# EAGLE board shield (EAGLE 6.5.0)
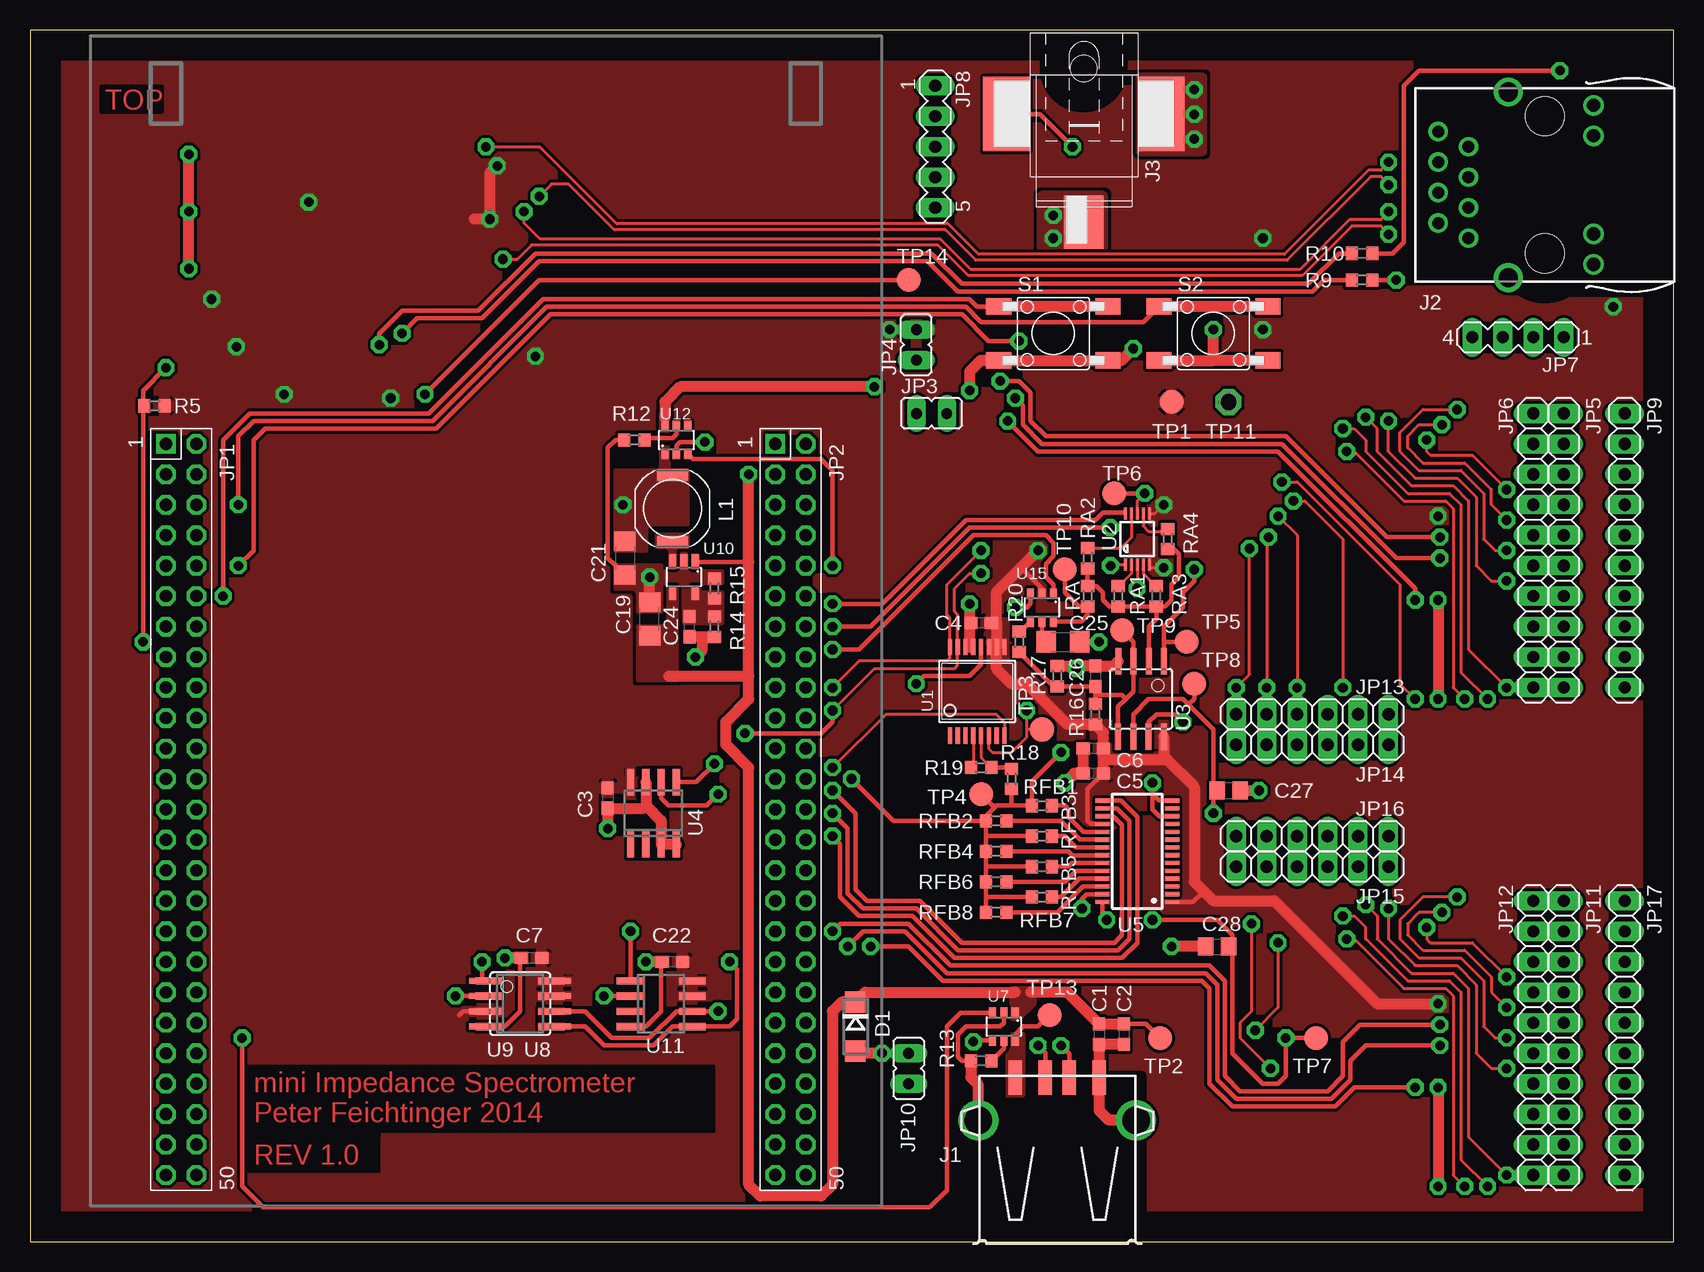
[diagram p0: board, top side]
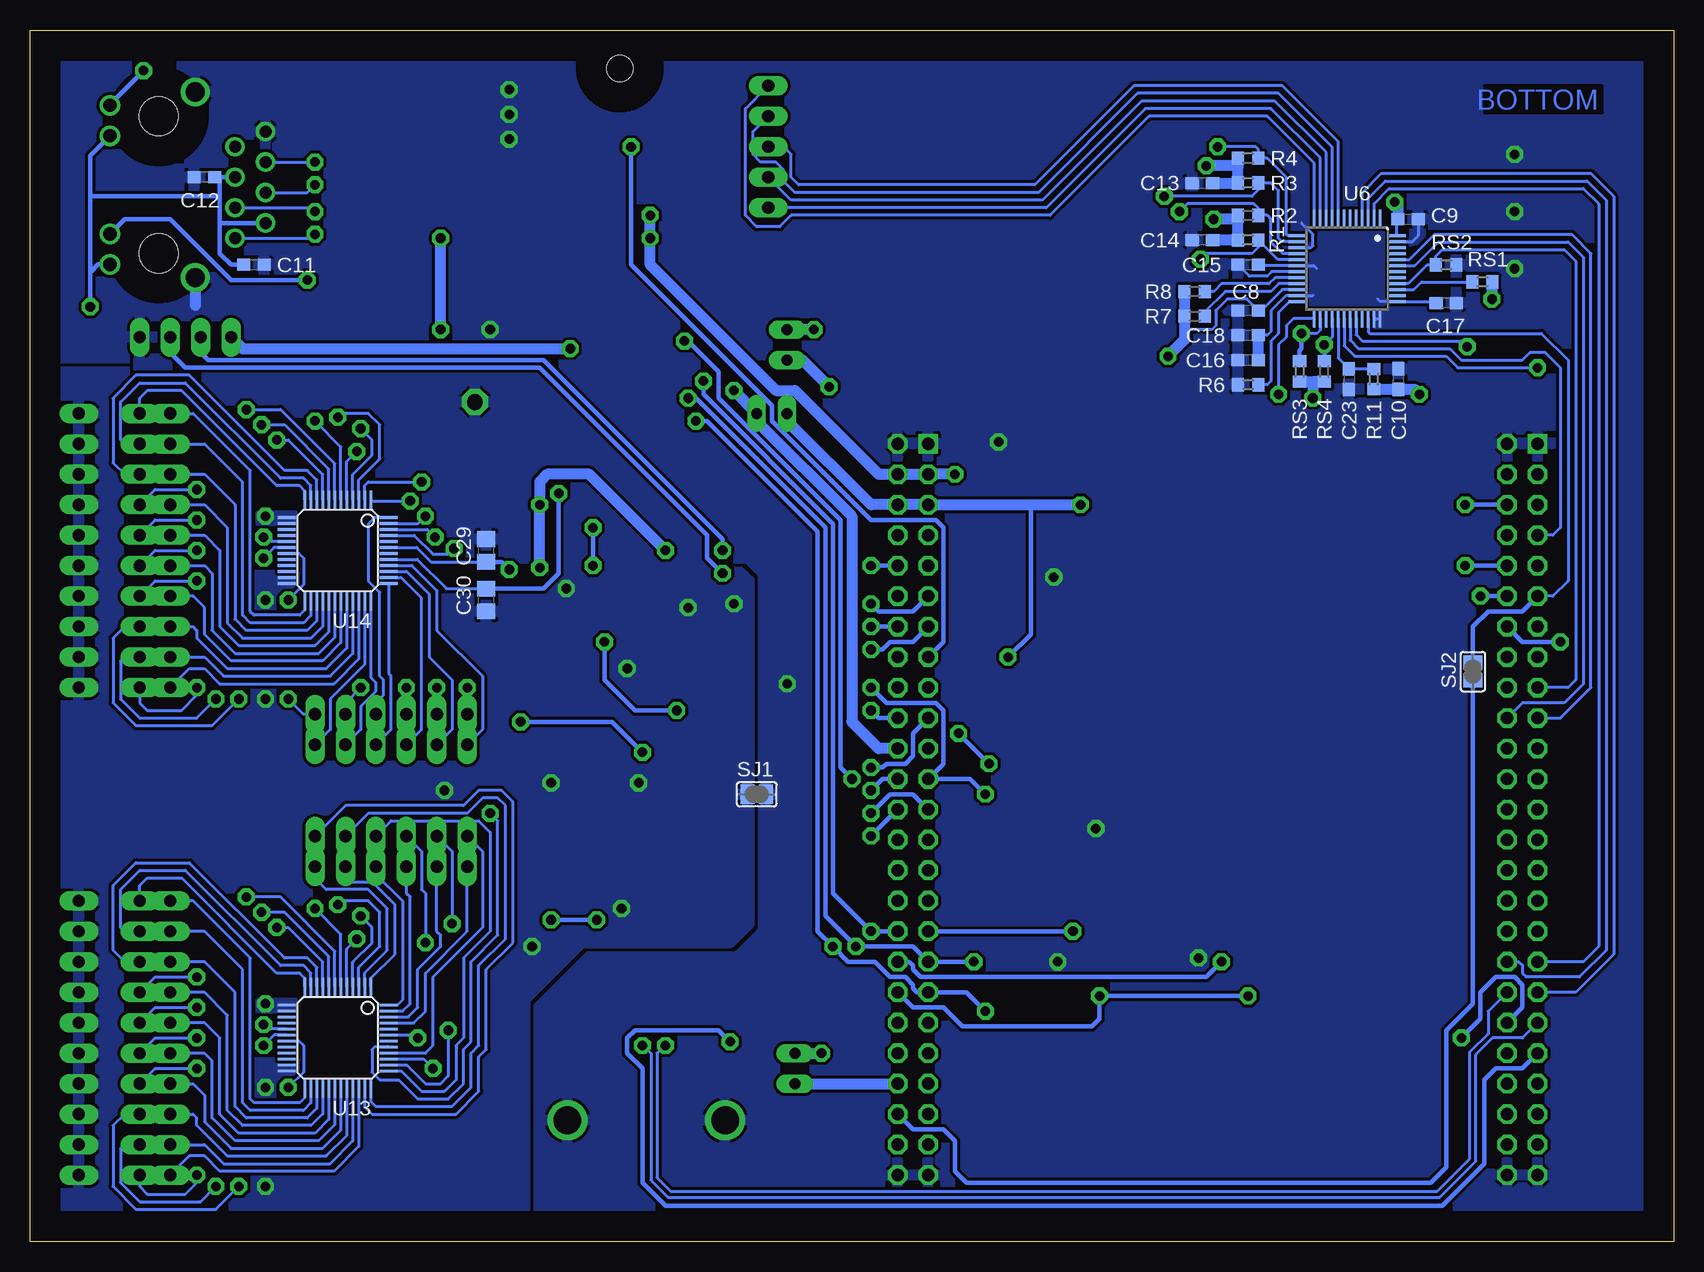
[diagram p1: board, bottom side, seen from below]

Size 137 x 101 mm. Coordinates in mm from the lower left corner, seen from the top.
Outline: 0,0 137,0 137,101 0,101 0,0
Copper layers (1*16): Top 0.035mm / dielectric 1.5mm / Bottom 0.035mm
Design rules "ime": minimum track width 10mil, minimum drill 0.8mm, track to track 10mil, track to pad 10mil, pad to pad 10mil, via to via 10mil, smd to smd 4mil, copper to edge 100mil, drill to drill 8mil, minimum pad ring 12mil, minimum via ring 12mil, stop-mask expansion 4mil, vias tented up to drill 0mil, thermal gap 10mil
Net classes: 1 supply: width 0.914 mm
tRestrict: area 115.5,79.2 to 136.7,97; area 78.6,0.1 to 92.6,13.8; 12 lines
bRestrict: 4 lines

## Footprints (pad centres in the part's own frame; a part is rotated, then mirrored left to right if it is on the bottom)
C0603 = smd 1.1 x 1: 1 -0.85,0; 2 0.85,0
C3216 = smd 1.6 x 1.8: 1 -1.4,0; 2 1.4,0
C1206 = smd 1.6 x 1.8: 1 -1.4,0; 2 1.4,0
C0805 = smd 1.3 x 1.5: 1 -0.95,0; 2 0.95,0
DO214AC = smd 1.8 x 1.7: A 2.05,0; C -2.05,0
USB-2410-06 = smd 1.12 x 2.88: 1 -3.5,13.86; 2 -1,13.86; 3 1,13.86; 4 3.5,13.86 | drill 2.3: S1 -6.57,10.28; S2 6.57,10.28
SI-60062-F = drill 1: 1 -4.445,6.35; 2 -3.175,8.89; 3 -1.905,6.35; 4 -0.635,8.89; 5 0.635,6.35; 6 1.905,8.89; 7 3.175,6.35; 8 4.445,8.89 | drill 1.1: AG 4.089,-4.064; AY -6.629,-4.064; CG 6.629,-4.064; CY -4.089,-4.064 | drill 1.6 pad 2.2: S1 -7.747,3.048; S2 7.747,3.048 | hole 3.251: -5.715,0; 5.715,0
JACK-SMD2.5 = smd 4.4 x 3.3: 1 15.8,0 | smd 6.2 x 3.9: 2 6.8,6.45; 3 6.8,-6.45 | hole 2.2: 3,0
2X25-F = drill 1.016 square: 1 -30.48,-1.27 | drill 1.016 octagon: 2 -30.48,1.27; 3 -27.94,-1.27; 4 -27.94,1.27; 5 -25.4,-1.27; 6 -25.4,1.27; 7 -22.86,-1.27; 8 -22.86,1.27; 9 -20.32,-1.27; 10 -20.32,1.27; 11 -17.78,-1.27; 12 -17.78,1.27; 13 -15.24,-1.27; 14 -15.24,1.27; 15 -12.7,-1.27; 16 -12.7,1.27; 17 -10.16,-1.27; 18 -10.16,1.27; 19 -7.62,-1.27; 20 -7.62,1.27; 21 -5.08,-1.27; 22 -5.08,1.27; 23 -2.54,-1.27; 24 -2.54,1.27; 25 0,-1.27; 26 0,1.27; 27 2.54,-1.27; 28 2.54,1.27; 29 5.08,-1.27; 30 5.08,1.27; 31 7.62,-1.27; 32 7.62,1.27; 33 10.16,-1.27; 34 10.16,1.27; 35 12.7,-1.27; 36 12.7,1.27; 37 15.24,-1.27; 38 15.24,1.27; 39 17.78,-1.27; 40 17.78,1.27; 41 20.32,-1.27; 42 20.32,1.27; 43 22.86,-1.27; 44 22.86,1.27; 45 25.4,-1.27; 46 25.4,1.27; 47 27.94,-1.27; 48 27.94,1.27; 49 30.48,-1.27; 50 30.48,1.27
JP1 = drill 0.914 long: 1 0,-1.27; 2 0,1.27
1X10 = drill 1.016 long: 1 -11.43,0; 2 -8.89,0; 3 -6.35,0; 4 -3.81,0; 5 -1.27,0; 6 1.27,0; 7 3.81,0; 8 6.35,0; 9 8.89,0; 10 11.43,0
MA04-1 = drill 1.016 long: 1 -3.81,0; 2 -1.27,0; 3 1.27,0; 4 3.81,0
MA05-1 = drill 1.016 long: 1 -5.08,0; 2 -2.54,0; 3 0,0; 4 2.54,0; 5 5.08,0
1X06 = drill 1.016 long: 1 -6.35,0; 2 -3.81,0; 3 -1.27,0; 4 1.27,0; 5 3.81,0; 6 6.35,0
D63CB = smd 1 x 2.6: 1 -2.8,0; 2 2.8,0
R0603 = smd 1 x 1.1: 1 -0.85,0; 2 0.85,0
FSM = smd 1.4 x 2.1: 1 2.25,4.55; 2 2.25,-4.55; 3 -2.25,-4.55; 4 -2.25,4.55
SJ = smd 1.168 x 1.6: 1 -0.762,0; 2 0.762,0
TP20R = smd 2 x 2: TP 0,0
P1-13 = drill 1.321 pad 2.159 octagon: TP 0,0
SSOP16 = smd 0.35 x 1.35: 1 -2.275,-3.7; 2 -1.625,-3.7; 3 -0.975,-3.7; 4 -0.325,-3.7; 5 0.325,-3.7; 6 0.975,-3.7; 7 1.625,-3.7; 8 2.275,-3.7; 9 2.275,3.7; 10 1.625,3.7; 11 0.975,3.7; 12 0.325,3.7; 13 -0.325,3.7; 14 -0.975,3.7; 15 -1.625,3.7; 16 -2.275,3.7
MSOP10 = smd 0.25 x 1: 1 -1,-2.113; 2 -0.5,-2.113; 3 0,-2.113; 4 0.5,-2.113; 5 1,-2.113; 6 1,2.113; 7 0.5,2.113; 8 0,2.113; 9 -0.5,2.113; 10 -1,2.113
SOIC8 = smd 0.5 x 2.2: 1 -1.905,-3.154; 2 -0.645,-3.154; 3 0.625,-3.154; 4 1.895,-3.154; 5 1.905,3.154; 6 0.635,3.154; 7 -0.635,3.154; 8 -1.905,3.154
SO8 = smd 0.6 x 2.2: 1 -1.905,-2.6; 2 -0.635,-2.6; 3 0.635,-2.6; 4 1.905,-2.6; 5 1.905,2.6; 6 0.635,2.6; 7 -0.635,2.6; 8 -1.905,2.6
TSSOP28 = smd 0.35 x 1.2: 1 -4.225,-2.9; 2 -3.575,-2.9; 3 -2.925,-2.9; 4 -2.275,-2.9; 5 -1.625,-2.9; 6 -0.975,-2.9; 7 -0.325,-2.9; 8 0.325,-2.9; 9 0.975,-2.9; 10 1.625,-2.9; 11 2.275,-2.9; 12 2.925,-2.9; 13 3.575,-2.9; 14 4.225,-2.9; 15 4.225,2.9; 16 3.575,2.9; 17 2.925,2.9; 18 2.275,2.9; 19 1.625,2.9; 20 0.975,2.9; 21 0.325,2.9; 22 -0.325,2.9; 23 -0.975,2.9; 24 -1.625,2.9; 25 -2.275,2.9; 26 -2.925,2.9; 27 -3.575,2.9; 28 -4.225,2.9
LQFP48 = smd 1.5 x 0.22: 1 -4.15,2.75; 2 -4.15,2.25; 3 -4.15,1.75; 4 -4.15,1.25; 5 -4.15,0.75; 6 -4.15,0.25; 7 -4.15,-0.25; 8 -4.15,-0.75; 9 -4.15,-1.25; 10 -4.15,-1.75; 11 -4.15,-2.25; 12 -4.15,-2.75; 25 4.15,-2.75; 26 4.15,-2.25; 27 4.15,-1.75; 28 4.15,-1.25; 29 4.15,-0.75; 30 4.15,-0.25; 31 4.15,0.25; 32 4.15,0.75; 33 4.15,1.25; 34 4.15,1.75; 35 4.15,2.25; 36 4.15,2.75 | smd 0.22 x 1.5: 13 -2.75,-4.15; 14 -2.25,-4.15; 15 -1.75,-4.15; 16 -1.25,-4.15; 17 -0.75,-4.15; 18 -0.25,-4.15; 19 0.25,-4.15; 20 0.75,-4.15; 21 1.25,-4.15; 22 1.75,-4.15; 23 2.25,-4.15; 24 2.75,-4.15; 37 2.75,4.15; 38 2.25,4.15; 39 1.75,4.15; 40 1.25,4.15; 41 0.75,4.15; 42 0.25,4.15; 43 -0.25,4.15; 44 -0.75,4.15; 45 -1.25,4.15; 46 -1.75,4.15; 47 -2.25,4.15; 48 -2.75,4.15
SOT23-6 = smd 0.6 x 0.9: 1 -0.95,-1.15; 2 0,-1.15; 3 0.95,-1.15; 4 0.95,1.15; 5 0,1.15; 6 -0.95,1.15
TSOT23-5 = smd 0.62 x 1.22: 1 -0.95,-1.3; 2 0,-1.3; 3 0.95,-1.3; 4 0.95,1.3; 5 -0.95,1.3
TQFP48 = smd 0.22 x 1.5: 1 -2.75,-4.25; 2 -2.25,-4.25; 3 -1.75,-4.25; 4 -1.25,-4.25; 5 -0.75,-4.25; 6 -0.25,-4.25; 7 0.25,-4.25; 8 0.75,-4.25; 9 1.25,-4.25; 10 1.75,-4.25; 11 2.25,-4.25; 12 2.75,-4.25; 25 2.75,4.25; 26 2.25,4.25; 27 1.75,4.25; 28 1.25,4.25; 29 0.75,4.25; 30 0.25,4.25; 31 -0.25,4.25; 32 -0.75,4.25; 33 -1.25,4.25; 34 -1.75,4.25; 35 -2.25,4.25; 36 -2.75,4.25 | smd 1.5 x 0.22: 13 4.25,-2.75; 14 4.25,-2.25; 15 4.25,-1.75; 16 4.25,-1.25; 17 4.25,-0.75; 18 4.25,-0.25; 19 4.25,0.25; 20 4.25,0.75; 21 4.25,1.25; 22 4.25,1.75; 23 4.25,2.25; 24 4.25,2.75; 37 -4.25,2.75; 38 -4.25,2.25; 39 -4.25,1.75; 40 -4.25,1.25; 41 -4.25,0.75; 42 -4.25,0.25; 43 -4.25,-0.25; 44 -4.25,-0.75; 45 -4.25,-1.25; 46 -4.25,-1.75; 47 -4.25,-2.25; 48 -4.25,-2.75

## Placement (x,y rotation side)
C1  100n  [C0603]  89.12,17.29 270 top
C2  10u  [C0603]  91.18,17.29 270 top
C3  100n  [C0603]  48.16,36.97 270 top
C4  100n  [C0603]  79.28,51.58 180 top
C5  100n  [C0603]  88.64,39.04 180 top
C6  10u  [C0603]  88.64,41.1 180 top
C7  100n  [C0603]  41.81,23.64 180 top
C8  100n  [C0603]  35.46,77.61 180 bottom
C9  100n  [C0603]  22.12,85.23 0 bottom
C10  100n  [C0603]  22.92,71.9 90 bottom
C11  100n  [C0603]  118.33,81.42 0 bottom
C12  100n  [C0603]  122.45,88.72 180 bottom
C13  100n  [C0603]  39.27,88.25 0 bottom
C14  100n  [C0603]  39.27,83.49 180 bottom
C15  10u  [C0603]  35.46,81.42 0 bottom
C16  100n  [C0603]  35.46,73.48 0 bottom
C17  100n  [C0603]  18.95,78.25 180 bottom
C18  100n  [C0603]  35.46,75.55 0 bottom
C19  10u  [C3216]  51.65,51.9 90 top
C21  10u LowESR  [C3216]  49.59,56.98 270 top
C22  100n  [C0603]  53.56,23.32 180 top
C23  100n  [C0603]  27.05,71.9 270 bottom
C24  22p  [C0603]  54.99,51.26 90 top
C25  100u  [C1206]  86.1,49.99 0 top
C26  10u  [C0603]  88.8,47.13 270 top
C27  N/A  [C0805]  99.91,37.61 0 top
C28  N/A  [C0805]  98.96,24.59 0 top
C29  N/A  [C0805]  98.96,57.61 90 bottom
C30  N/A  [C0805]  98.96,53.48 90 bottom
D1  STPS1L30A  [DO214AC]  68.8,17.92 270 top
J1  USB-2410-06  [USB-2410-06]  85.62,-0.17 0 top
J2  SI-60062-F  [SI-60062-F]  126.27,88.09 90 top
J3  5V  [JACK-SMD2.5]  87.85,100.79 270 top
JP1  P1  [2X25-F]  12.6,36.02 270 top
JP2  P2  [2X25-F]  63.4,36.02 270 top
JP3  Idd  [JP1]  75.15,69.04 270 top
JP4  Icc  [JP1]  73.88,74.75 180 top
JP5  FORCE_OUT  [1X10]  127.85,57.61 270 top
JP6  SENSE_OUT  [1X10]  125.31,57.61 270 top
JP7  I2C  [MA04-1]  124.04,75.39 180 top
JP8  JTAG  [MA05-1]  75.47,91.27 270 top
JP9  GND  [1X10]  132.93,57.61 270 top
JP10  VBUS  [JP1]  73.24,14.43 0 top
JP11  FORCE_IN  [1X10]  127.85,16.97 270 top
JP12  SENSE_IN  [1X10]  125.31,16.97 270 top
JP13  CAL_FORCE_OUT  [1X06]  106.9,43.96 180 top
JP14  CAL_SENSE_OUT  [1X06]  106.9,41.42 180 top
JP15  CAL_FORCE_IN  [1X06]  106.9,31.26 180 top
JP16  CAL_SENSE_IN  [1X06]  106.9,33.8 180 top
JP17  GND  [1X10]  132.93,16.97 270 top
L1  A916CY-8R2M  [D63CB]  53.56,61.1 90 top
R1  51R  [R0603]  35.46,83.49 180 bottom
R2  51R  [R0603]  35.46,85.55 180 bottom
R3  51R  [R0603]  35.46,88.25 180 bottom
R4  51R  [R0603]  35.46,90.31 180 bottom
R5  1k5  [R0603]  10.38,69.67 0 top
R6  4k87 1%  [R0603]  35.46,71.42 0 bottom
R7  2k2  [R0603]  39.91,77.14 180 bottom
R8  2k2  [R0603]  39.91,79.2 180 bottom
R9  150R  [R0603]  111.03,80.15 0 top
R10  150R  [R0603]  111.03,82.38 0 top
R11  2k2  [R0603]  24.98,71.9 270 bottom
R12  510R  [R0603]  50.38,66.82 0 top
R13  510R  [R0603]  79.28,15.06 0 top
R14  680k 1%  [R0603]  57.05,51.26 270 top
R15  150k 1%  [R0603]  57.05,54.44 270 top
R16  2k2  [R0603]  88.8,43.96 270 top
R17  2k2  [R0603]  85.62,47.13 270 top
R18  10k  [R0603]  81.81,38.56 270 top
R19  10k  [R0603]  79.28,39.51 0 top
R20  10  [R0603]  82.45,49.99 270 top
RA  10k  [R0603]  88.16,53.8 270 top
RA1  10k  [R0603]  90.7,53.8 90 top
RA2  100  [R0603]  88.16,56.98 90 top
RA3  N/A  [R0603]  93.88,53.8 90 top
RA4  N/A  [R0603]  94.83,58.56 90 top
RFB1  100R  [R0603]  84.35,36.34 180 top
RFB2  1k  [R0603]  80.55,35.07 180 top
RFB3  10k  [R0603]  84.35,33.8 180 top
RFB4  100k  [R0603]  80.55,32.53 180 top
RFB5  1M  [R0603]  84.35,31.26 180 top
RFB6  N/A  [R0603]  80.55,29.99 180 top
RFB7  N/A  [R0603]  84.35,28.72 180 top
RFB8  N/A  [R0603]  80.55,27.45 180 top
RS1  2k2  [R0603]  15.93,79.99 180 bottom
RS2  2k2  [R0603]  18.95,81.42 0 bottom
RS3  2k2  [R0603]  31.17,72.53 90 bottom
RS4  2k2  [R0603]  29.11,72.53 90 bottom
S1  FSM4JSMATR  [FSM]  85.31,75.71 90 top
S2  FSM4JSMATR  [FSM]  98.64,75.71 90 top
SJ1  GND  [SJ]  76.42,37.29 0 bottom
SJ2  ETH_CLK  [SJ]  16.73,47.51 270 bottom
TP1  TPTP20R  [TP20R]  95.15,69.99 0 top
TP2  TPTP20R  [TP20R]  94.2,16.97 180 top
TP3  TPTP20R  [TP20R]  84.35,42.69 0 top
TP4  TPTP20R  [TP20R]  79.28,37.29 0 top
TP5  TPTP20R  [TP20R]  96.42,49.99 0 top
TP6  TPTP20R  [TP20R]  90.39,62.37 0 top
TP7  TPTP20R  [TP20R]  107.22,16.97 180 top
TP8  TPTP20R  [TP20R]  97.06,46.5 0 top
TP9  TPTP20R  [TP20R]  91.02,50.94 0 top
TP10  TPTP20R  [TP20R]  86.26,56.02 0 top
TP11  TPPAD1-13  [P1-13]  99.91,69.99 0 top
TP13  TPTP20R  [TP20R]  84.99,18.88 0 top
TP14  TPTP20R  [TP20R]  73.24,80.15 0 top
U1  AD5933YRS  [SSOP16]  78.96,45.86 0 top
U2  ADG704BRM  [MSOP10]  92.29,58.56 0 top
U3  AD8656ARZ  [SOIC8]  92.61,45.23 180 top
U4  M24C08WMN  [SO8]  51.97,35.7 0 top
U5  ADG706BRU  [TSSOP28]  92.29,32.53 90 top
U6  DP83848I  [LQFP48]  27.2,81.11 270 bottom
U7  MIC2009A-1YM6  [SOT23-6]  81.18,17.92 180 top
U8  AT25DF081A-SS  [SO8]  40.86,19.83 270 top
U9  SST25VF080B-80-4I-S2  [SOIC8]  40.86,19.83 270 top
U10  LTC3406AB  [TSOT23-5]  54.51,55.39 180 top
U11  23LCV1024-I/SN  [SO8]  52.61,19.83 270 top
U12  MIC2009A-1YM6  [SOT23-6]  53.88,66.82 0 top
U13  ADG725BSU  [TQFP48]  111.34,16.97 180 bottom
U14  ADG725BSU  [TQFP48]  111.34,57.61 180 bottom
U15  ADG819BRT  [SOT23-6]  84.35,52.85 180 top

## Library data of the parts
C1-C19 C21-C30 R1-R20 RA RA1-RA4 RFB1-RFB8 RS1-RS4 = rcl
D1 = parts; RS: 485-8061
J1 = parts; RS: 737-8791
J2 = parts; RS: 741-8489
J3 = parts; RS: 476-157
JP1 JP2 = parts; RS: 766-6660
JP3 JP4 JP10 SJ1 SJ2 = jumper
JP5 JP6 JP9 JP11-JP17 = pinhead
JP7 JP8 = con-lstb; OC_FARNELL: unknown; OC_NEWARK: unknown
L1 = parts; INDUCTANCE: 8.2u; RS: 752-1361
S1 S2 = parts; RS: 718-2455
TP1 = testpad; TP_SIGNAL_NAME: VCC
TP2 = testpad; TP_SIGNAL_NAME: 5V
TP3 = testpad; TP_SIGNAL_NAME: VOUT
TP4 = testpad; TP_SIGNAL_NAME: VIN
TP5 = testpad; TP_SIGNAL_NAME: FORCE_OUT
TP6 = testpad; TP_SIGNAL_NAME: SENSE_OUT
TP7 = testpad; TP_SIGNAL_NAME: FORCE_IN
TP8 = testpad; TP_SIGNAL_NAME: SENSE_IN
TP9 = testpad; TP_SIGNAL_NAME: VCC/2
TP10 = testpad; TP_SIGNAL_NAME: Vcoupl
TP11 = testpad; TP_SIGNAL_NAME: AGND
TP13 = testpad; TP_SIGNAL_NAME: USBH_VBUS
TP14 = testpad; TP_SIGNAL_NAME: MAC_CLK
U1 = parts; RS: 709-4816
U2 = parts; RS: 523-8761
U3 = parts; RS: 759-1370
U4 = parts; RS: 415-1180; VCC: 2.5V - 5.5V
U5 = parts; RS: 523-6478
U6 = parts; MPN: DP83848IVV; RS: 651-5766
U7 U12 = parts; RS: 727-4832
U8 = parts; RS: 738-0094
U9 = parts; RS: 736-9258
U10 = parts; RS: 761-9409
U11 = parts; RS: 792-8738
U13 U14 = parts; RS: 538-6747
U15 = parts; RS: 796-8956

## Nets
!RST: JP1.6 S2.1 S2.2
+3V3 [supply]: C21.1 C24.1 JP2.5 JP2.6 JP3.1 L1.2 R14.2 U12.1
+5V [supply]: C1.1 C2.1 C19.1 D1.C J3.1 JP2.3 JP2.4 TP2.TP U7.1 U10.1 U10.4
AGND [supply]: C4.2 C5.2 C6.2 C26.1 C27.2 C28.1 C29.2 C30.1 JP9.1 JP9.2 JP9.3 JP9.4 JP9.5 JP9.6 JP9.7 JP9.8 JP9.9 JP9.10 JP17.1 JP17.2 JP17.3 JP17.4 JP17.5 JP17.6 JP17.7 JP17.8 JP17.9 JP17.10 R17.1 SJ1.1 TP11.TP U1.13 U1.14 U2.3 U3.4 U5.12 U5.14 U5.27 U13.23 U13.24 U14.23 U14.24 U15.3
ETH_CLK: JP1.11 SJ2.1 U6.34
GND [supply]: C1.2 C2.2 C3.2 C7.2 C8.2 C9.2 C10.2 C11.2 C12.2 C13.1 C14.2 C15.1 C16.1 C17.1 C18.1 C19.2 C21.2 C22.2 C23.2 J1.4 J1.S1 J1.S2 J2.8 J2.S1 J2.S2 J3.2 JP1.1 JP1.2 JP1.49 JP1.50 JP2.1 JP2.2 JP2.49 JP2.50 JP7.1 R6.1 R12.1 R13.1 R15.1 RS2.2 S2.3 S2.4 SJ1.2 U1.12 U4.3 U4.4 U4.7 U6.15 U6.19 U6.35 U6.36 U6.47 U7.2 U8.4 U9.4 U10.2 U11.4 U12.2
N$2: RA.2 TP10.TP U15.6
N$3 [analog]: RA1.1 RA2.1 RA3.1 RA4.1 RA.1 U3.2
N$4 [analog]: RA3.2 U2.4
N$5 [analog]: RA4.2 U2.7
N$6 [analog]: RFB1.1 U5.19
N$7 [analog]: RFB2.1 U5.20
N$8 [analog]: RFB3.1 U5.21
N$9 [analog]: RFB4.1 U5.22
N$10 [analog]: RFB5.1 U5.23
N$11 [analog]: RFB6.1 U5.24
N$12 [analog]: C27.1 TP8.TP U3.6 U13.41
N$13 [analog]: C28.2 TP7.TP U5.28 U13.43
N$14 [analog]: C29.1 TP5.TP U3.1 U14.43
N$15 [analog]: C30.2 TP6.TP U2.8 U14.41
N$16 [analog]: JP12.1 U13.25
N$17 [analog]: JP12.2 U13.26
N$18 [analog]: JP12.3 U13.27
N$19 [analog]: JP12.4 U13.28
N$20: J2.CY R9.2
N$21: RS1.2 U6.39
N$22: R9.1 RS3.2 U6.26
N$23: R10.1 RS4.2 U6.28
N$24: C15.2 C16.2 C17.2 C18.2 U6.18 U6.23 U6.37
N$25: J2.CG R10.2
N$26 [supply]: J1.1 TP13.TP U7.6
N$27: JP8.1 U6.12
N$28: JP8.2 U6.9
N$29: JP8.3 U6.8
N$30: JP8.4 U6.10
N$31: JP8.5 U6.11
N$32: C23.1 R11.1 U6.29
N$33: R6.2 U6.24
N$34: R8.1 U6.20
N$35: R7.1 U6.21
N$36: JP4.2 U12.6
N$37: D1.A JP10.2
N$38: R12.2 U12.5
N$39: R13.2 U7.5
N$40 [supply]: C24.2 R14.1 R15.2 U10.5
N$41 [supply]: L1.1 U10.3
N$42 [analog]: JP12.5 U13.29
N$43 [analog]: JP12.6 U13.30
N$44 [analog]: JP12.7 U13.31
N$45 [analog]: JP12.8 U13.32
N$46 [analog]: JP12.9 U13.33
N$47 [analog]: JP12.10 U13.34
N$48 [analog]: JP11.1 U13.12
N$49 [analog]: JP11.2 U13.11
N$50 [analog]: JP11.3 U13.10
N$51 [analog]: JP11.4 U13.9
N$52 [analog]: JP11.5 U13.8
N$53 [analog]: JP11.6 U13.7
N$54 [analog]: JP11.7 U13.6
N$55 [analog]: JP11.8 U13.5
N$56 [analog]: JP11.9 U13.4
N$57 [analog]: JP11.10 U13.3
N$58 [analog]: JP5.1 U14.12
N$59 [analog]: JP5.2 U14.11
N$60 [analog]: JP5.3 U14.10
N$61 [analog]: JP5.4 U14.9
N$62 [analog]: JP5.5 U14.8
N$63 [analog]: JP5.6 U14.7
N$64 [analog]: JP5.7 U14.6
N$65 [analog]: JP5.8 U14.5
N$66 [analog]: JP5.9 U14.4
N$67 [analog]: JP5.10 U14.3
N$68 [analog]: JP6.1 U14.25
N$69 [analog]: JP6.2 U14.26
N$70 [analog]: JP6.3 U14.27
N$71 [analog]: JP6.4 U14.28
N$72 [analog]: JP6.5 U14.29
N$73 [analog]: JP6.6 U14.30
N$74 [analog]: JP6.7 U14.31
N$75 [analog]: JP6.8 U14.32
N$76 [analog]: JP6.9 U14.33
N$77 [analog]: JP6.10 U14.34
N$78 [analog]: JP13.1 U14.2
N$79 [analog]: JP13.2 U14.1
N$80 [analog]: JP13.3 U14.48
N$81 [analog]: JP13.4 U14.47
N$82 [analog]: JP13.5 U14.46
N$83 [analog]: JP13.6 U14.45
N$84 [analog]: JP14.1 U14.35
N$85 [analog]: JP14.2 U14.36
N$86 [analog]: JP14.3 U14.37
N$87 [analog]: JP14.4 U14.38
N$88 [analog]: JP14.5 U14.39
N$89 [analog]: JP14.6 U14.40
N$90 [analog]: JP15.1 U13.2
N$91 [analog]: JP15.2 U13.1
N$92 [analog]: JP15.3 U13.48
N$93 [analog]: JP15.4 U13.47
N$94 [analog]: JP15.5 U13.46
N$95 [analog]: JP15.6 U13.45
N$96 [analog]: JP16.1 U13.35
N$97 [analog]: JP16.2 U13.36
N$98 [analog]: JP16.3 U13.37
N$99 [analog]: JP16.4 U13.38
N$100 [analog]: JP16.5 U13.39
N$101 [analog]: JP16.6 U13.40
N$102 [analog]: RA2.2 U2.9
N$103 [analog]: RA1.2 U2.2
N$104 [analog]: RFB7.1 U5.25
N$105 [analog]: RFB8.1 U5.26
N$106: TP14.TP U6.25
N$107: C25.1 U15.5
N$108 [analog]: R20.1 U15.4
PA0: JP1.12 S1.1 S1.2
PA2: JP1.14 R5.1 U6.30
PA7: JP1.17 RS2.1 U6.40
PA9: JP2.44 JP10.1
PB4: JP2.25 U5.16
PB5: JP2.26 U5.15
PB6: JP2.23 JP7.3 U1.16 U4.6
PB7: JP2.24 U5.17
PB8: JP2.19 U1.8
PB9: JP2.20 JP7.2 U1.15 U4.5
PB11: JP1.35 U6.2
PB12: JP1.36 U6.3
PB13: JP1.37 U6.4
PC1: JP1.7 U6.31
PC2: JP1.10 R18.2 RFB1.2 RFB2.2 RFB3.2 RFB4.2 RFB5.2 RFB6.2 RFB7.2 RFB8.2 TP4.TP U3.7
PC4: JP1.20 U6.43
PC5: JP1.19 U6.44
PC9: JP2.46 SJ2.2
PC10: JP2.37 U8.6 U9.6 U11.6 U13.19 U14.19
PC11: JP2.38 U8.2 U9.2 U11.2
PC12: JP2.35 U8.5 U9.5 U11.5 U13.18 U14.18
PC15: JP2.10 U12.3
PD0: JP2.36 U8.1 U9.1
PD1: JP2.33 U11.1
PD2: JP2.34 U13.17 U14.17
PD8: JP1.40 U7.3
PD9: JP1.41 U7.4
PE2: J3.3 JP2.15
PE4: JP2.13 U15.1
PE5: JP2.14 U2.1
PE6: JP2.11 U2.10
RD_N: J2.6 R4.1 U6.13
RD_P: J2.4 R3.1 U6.14
RFB [analog]: R19.1 U1.4
TD_N: J2.3 R2.1 U6.16
TD_P: J2.1 R1.1 U6.17
USB_N: J1.2 JP1.38
USB_P: J1.3 JP1.39
VCC [supply]: C3.1 C4.1 C5.1 C6.1 C7.1 C8.1 C9.1 C10.1 C11.1 C12.1 C13.2 C14.1 C22.1 J2.2 J2.5 J2.AG J2.AY JP4.1 R1.2 R2.2 R3.2 R4.2 R5.2 R7.2 R8.2 R11.2 R16.2 RS1.1 RS3.1 RS4.1 TP1.TP U1.9 U1.10 U1.11 U2.5 U2.6 U3.8 U4.8 U5.1 U5.18 U6.22 U6.32 U6.48 U8.3 U8.7 U8.8 U9.3 U9.7 U9.8 U11.7 U11.8 U13.13 U13.14 U14.13 U14.14 U15.2
VCC/2 [analog]: C26.2 R16.1 R17.2 R20.2 TP9.TP U3.3 U3.5
VDD [supply]: JP2.22 JP3.2 JP7.4 S1.3 S1.4
VIN [analog]: R18.1 R19.2 U1.5
VOUT [analog]: C25.2 TP3.TP U1.6

## Tracks (layer width: path | path; a pad name or v marks a point on that pad's centre or on a via)
!RST  (via drill 0.8)
  Top 0.356: v17.36,61.42 17.36,67.14 18.63,68.41 33.55,68.41 43.08,77.93 78,77.93 79.28,76.66 92.8,76.66 S2.1
  Top 0.914: S2.2 S2.1
  Bottom 0.356: JP1.6 v17.36,61.42
+3V3  (via drill 0.8)
  Top 0.914: R14.2 56.01,50.41 | 56.01,50.41 C24.1 | 56.01,50.41 56.01,49.27 v55.46,48.72
  Bottom 0.356: v55.46,48.72 53.56,50.62 53.56,61.42
  Bottom 0.914: JP3.1 73.88,68.41 66.89,61.42 JP2.6 JP2.5 53.56,61.42 v49.43,61.42
  pour Top (rank 2, no thermals): 48.8,57.61 51.34,57.61 51.34,59.52 51.65,59.83 54.83,59.83 54.83,64.28 53.24,64.28 53.24,66.18 52.61,66.18 52.61,64.28 48.8,64.28
+5V  (via drill 0.8)
  Top 0.356: U10.1 55.49,56.66 59.91,56.66 | C2.1 93.03,18.14 TP2.TP
  Top 0.914: C2.1 C1.1 86.47,20.78 83.4,20.78 | 59.91,47.13 59.91,45.23 58,43.32 58,41.42 59.91,39.51 59.91,4.75 60.86,3.79 65.94,3.79 66.89,4.75 66.89,19.19 67.67,19.97 D1.C 69.61,20.78 82.13,20.78 | 59.91,47.13 59.91,56.66 v59.91,63.96 | 53.24,47.13 59.91,47.13
  Bottom 0.914: v85.31,85.55 v85.31,83.64 85.31,81.42 74.83,70.94 73.24,70.94 66.26,63.96 JP2.4 JP2.3 v59.91,63.96
  pour Top (rank 2, no thermals): 50.7,51.26 52.92,51.26 53.24,51.58 53.24,54.75 53.88,54.75 53.88,46.81 50.7,46.81
  pour Top (rank 2, no thermals): 81.81,18.56 81.81,21.1 83.72,21.1 83.72,19.83 82.45,18.56
  pour Top (no thermals): 84.35,82.69 89.44,82.69 89.44,87.14 84.35,87.14
AGND  (via drill 0.8)
  Top 0.254: U2.3 v92.29,54.44 | U1.13 78.32,49.56 U1.14
  Top 0.356: U5.12 94.13,35.45 93.56,36.02 93.56,37.29 | 93.56,37.29 v93.56,38.24 | U5.14 94.1,36.75 93.56,37.29 | U5.27 88.08,28.95 87.69,28.56 v87.69,27.77 | U15.3 83.41,53.17 83.09,52.85 v82.13,52.85
  Top 0.914: v117.38,53.48 v117.38,45.23 | v117.38,12.84 v117.38,4.59 | U3.4 90.32,47.98 C26.1 87.21,47.98 | v78.32,53.16 78.32,51.68 C4.2 78.32,51.58 78.32,49.56 | C27.2 v102.45,37.61 | C6.2 C5.2 87.05,39.04 v86.26,38.24 | C28.1 v95.15,24.59 | R17.1 87.21,47.98 | 87.21,47.98 v87.21,47.77
  pour Bottom (no thermals): 114.83,55.39 117.38,55.39 118.01,54.75 118.01,53.16 117.69,52.85 117.06,52.85 116.74,53.16 116.74,54.44 116.42,54.75 114.83,54.75
  pour Bottom (no thermals): 114.83,14.75 117.38,14.75 118.01,14.11 118.01,12.53 117.69,12.21 117.06,12.21 116.74,12.53 116.74,13.79 116.42,14.11 114.83,14.11
  pour Bottom (rank 5): 137.06,-0.17 137.06,72.53 94.52,72.53 77.05,55.07 77.05,26.5 78.64,24.91 91.02,24.91 95.78,20.14 95.78,-0.17
ETH_CLK
  Bottom 0.254: U6.34 25.45,75.86 25.3,75.71 11.01,75.71 8.79,73.48 8.79,55.07 10.06,53.8 JP1.11
  Bottom 0.356: JP1.11 12.6,52.53 15.46,52.53 16.73,51.26 SJ2.1
GND  (via drill 0.8)
  Top 0.356: R13.1 77.69,15.06 77.37,15.38 77.37,17.29 78,17.92 80.86,17.92 81.18,18.24 U7.2 | v73.88,46.5 74.51,47.13 78.32,47.13 79.28,48.09 U1.12 | U11.4 51.34,17.92 52.61,19.19 52.61,23.22 C22.2 | C7.2 40.86,23.54 40.86,19.19 39.59,17.92 U8.4 U9.4 | U12.2 53.88,66.34 54.19,66.66 v56.26,66.66 | R12.1 48.8,66.82 48.16,66.18 48.16,56.98 48.8,56.34
  Top 0.914: C19.2 v51.65,55.39 | C2.2 C1.2 89.12,13.69 | 89.12,13.69 J1.4 | 89.12,13.69 89.12,10.94 89.95,10.11 J1.S2 | R13.1 78.42,13.69 79.06,13.06 J1.S1 | v13.23,81.11 v13.23,85.87 v13.23,90.63 | C22.2 v51.34,23.32 | C7.2 v39.59,23.64 | U4.4 U4.3 52.61,35.07 51.34,36.34 | U4.7 51.34,36.34 | 51.34,36.34 51.12,36.12 C3.2 v48.16,34.43 | S2.4 98.64,73.46 | 98.64,73.46 v98.64,76.03 | S2.3 98.64,73.46
  Bottom 0.254: U6.19 33.49,80.86 33.87,80.47 35.36,80.47 C15.1 | U6.35 U6.36 | U6.15 30.22,82.86 30.06,83.01 30.06,83.96 31.02,84.92 | U6.47 21.78,83.36 21.27,83.86 C9.2
  Bottom 0.914: J2.S1 123.22,78.06
  other vias: 97.06,96.03 97.06,93.96 97.06,91.9
  pour Top (no thermals): 52.61,56.34 48.8,56.34 48.8,54.44 50.38,54.44 50.7,54.12 50.7,52.53 52.61,52.53 52.61,54.91 57.69,54.91 57.69,55.86 54.67,55.86 54.67,57.29 54.35,57.29 54.35,55.86 52.61,55.86
  pour Bottom (rank 6): -0.1,-0.17 -0.1,100.79 137.06,100.79 137.06,-0.17
  pour Top (no thermals): 92.61,96.98 92.61,90.95 97.69,90.95 97.69,96.98
N$2
  Top 0.356: U15.6 87.65,51.7 88.16,52.21 RA.2 87.43,52.95 86.26,54.12 TP10.TP
N$3
  Top 0.356: RA2.1 RA.1 88.9,54.65 89.44,54.12 89.44,53.48 89.97,52.95 RA1.1 RA3.1 | U3.2 93.25,51.27 93.88,51.9 RA3.1 | RA4.1 95.37,57.71 95.78,57.29 95.78,55.39 95.15,54.75 95.15,53.48 94.62,52.95 RA3.1
N$4
  Top 0.254: U2.4 92.79,55.68 93.82,54.65 RA3.2
N$5
  Top 0.254: U2.7 92.79,59.65 93.25,59.2 94.62,59.2 RA4.2
N$6
  Top 0.356: U5.19 87.81,34.15 86.58,35.38 86.58,36.02 86.26,36.34 RFB1.1
N$7
  Top 0.356: U5.20 87.51,33.5 85.94,35.07 RFB2.1
N$8
  Top 0.356: U5.21 87.2,32.85 86.26,33.8 RFB3.1
N$9
  Top 0.356: U5.22 86.9,32.2 86.58,32.53 RFB4.1
N$10
  Top 0.356: U5.23 86.87,31.55 86.58,31.26 RFB5.1
N$11
  Top 0.356: U5.24 87.17,30.9 86.26,29.99 RFB6.1
N$12  (via drill 0.8)
  Top 0.356: U3.6 91.97,43.96 93.25,45.23 96.1,45.23 96.58,44.75 | 96.58,44.75 98.64,42.69 98.64,37.61 | 98.64,37.61 v98.64,35.7 | TP8.TP 97.06,45.23 96.58,44.75 | C27.1 98.64,37.61
  Bottom 0.254: U13.41 108.28,16.22 108.48,16.02 108.48,14.11 107.85,13.48 106.26,13.48 104.67,11.89 102.14,11.89 100.87,13.16 100.87,16.02 100.23,16.65 100.23,23.32 98.01,25.54 98.01,35.07 v98.64,35.7
N$13  (via drill 0.8)
  Top 0.356: TP7.TP v104.67,16.97 104.67,13.79 104.04,13.16 102.77,13.16 100.23,15.7 100.23,24.59 | 100.23,24.59 100.23,25.54 98.96,26.81 v93.56,26.81 | v89.75,26.81 89.39,27.17 U5.28 | C28.2 100.23,24.59
  Bottom 0.254: U13.43 104.92,17.22 v104.67,16.97
  Bottom 0.356: v89.75,26.81 v93.56,26.81
N$14  (via drill 0.8)
  Top 0.356: 94.52,49.99 94.52,51.26 96.1,52.85 96.1,54.12 97.06,55.07 v97.06,56.02 | 94.52,49.99 U3.1 | TP5.TP 94.52,49.99
  Bottom 0.254: U14.43 104.77,57.86 103.57,56.66 C29.1
  Bottom 0.356: C29.1 97.69,56.66 v97.06,56.02
N$15  (via drill 0.8)
  Top 0.254: U2.8 92.29,61.74 v92.93,62.37
  Top 0.356: v92.93,62.37 TP6.TP
  Bottom 0.254: U14.41 104.72,56.86 102.29,54.43 C30.2
  Bottom 0.356: C30.2 94.2,54.43 92.93,55.7 v92.93,62.37
N$16
  Bottom 0.254: U13.25 114.09,12 114.52,11.57 118.33,11.57 118.64,11.89 118.64,23.64 123.41,28.4 JP12.1
N$17
  Bottom 0.254: U13.26 113.59,11.54 114.2,10.94 118.64,10.94 119.28,11.57 119.28,22.68 122.45,25.86 JP12.2
N$18
  Bottom 0.254: U13.27 113.09,11.09 113.88,10.3 118.96,10.3 119.92,11.26 119.92,20.78 122.45,23.32 JP12.3
N$19
  Bottom 0.254: U13.28 112.59,10.64 113.56,9.67 119.28,9.67 120.55,10.94 120.55,18.88 122.45,20.78 JP12.4
N$20  (via drill 0.8)
  Top 0.356: R9.2 v113.88,80.15
  Bottom 0.356: J2.CY 130.33,84.03 129.12,85.23 125.31,85.23 120.23,80.15 v113.88,80.15
N$21
  Bottom 0.254: U6.39 21.65,79.36 21.01,79.99 RS1.2
N$22  (via drill 0.8)
  Top 0.356: v31.02,75.71 32.28,76.98 37.68,76.98 42.45,81.74 74.83,81.74 77.37,79.2 106.9,79.2 107.85,80.15 R9.1
  Bottom 0.254: U6.26 29.45,76 29.74,75.71 v31.02,75.71
  Bottom 0.356: RS3.2 31.17,74.28 31.02,74.44 v31.02,75.71
N$23  (via drill 0.8)
  Top 0.356: v29.11,74.75 29.11,75.71 31.02,77.61 37.37,77.61 42.13,82.38 75.15,82.38 77.69,79.83 106.58,79.83 109.12,82.38 R10.1
  Bottom 0.254: U6.28 28.45,75.41 v29.11,74.75
  Bottom 0.356: RS4.2 v29.11,74.75
N$24
  Bottom 0.254: C15.2 34.54,81.36 U6.18 29.99,81.36 29.74,81.11 | C18.2 33.87,75.55 33.55,75.87 33.55,77.61 32.31,78.86 U6.23 30.09,78.86 30.06,78.88 | 24.66,78.56 24.45,78.36 U6.37 19.91,78.36 C17.2
  Bottom 0.914: C16.2 C18.2
  pour Bottom (no thermals): 24.35,77.93 30.06,77.93 30.38,78.25 30.38,83.96 30.06,84.28 24.35,84.28 24.03,83.96 24.03,78.25
N$25  (via drill 0.8)
  Top 0.356: R10.2 113.56,82.38 114.52,83.33 114.52,96.34 115.79,97.61 v127.53,97.61
  Bottom 0.356: J2.CG 130.33,94.82 v127.53,97.61
N$26
  Top 0.356: U7.6 82.13,17.29 82.77,17.92 84.04,17.92 TP13.TP
  pour Top (rank 2, no thermals): 81.5,17.29 82.77,17.29 82.77,12.21 81.5,12.21
N$27
  Bottom 0.254: U6.12 29.95,89.89 33.87,93.81 43.72,93.81 51.97,85.55 73.56,85.55 74.51,84.6 76.42,84.6 77.37,85.55 77.37,94.44 JP8.1
N$28
  Bottom 0.254: U6.9 28.45,91.25 32.92,95.71 44.67,95.71 52.92,87.45 73.24,87.45 74.19,88.41 74.19,89.36 74.83,90 76.1,90 76.73,90.63 76.73,92.53 JP8.2
N$29
  Bottom 0.254: U6.8 27.95,91.7 32.6,96.34 44.98,96.34 53.24,88.09 72.92,88.09 73.56,88.72 73.56,90.63 74.19,91.27 JP8.3
N$30
  Bottom 0.254: U6.10 28.95,90.79 33.24,95.08 44.35,95.08 52.61,86.82 73.56,86.82 JP8.4
N$31
  Bottom 0.254: U6.11 29.45,90.34 33.55,94.44 44.03,94.44 52.29,86.19 JP8.5
N$32
  Bottom 0.254: R11.1 C23.1 27.95,73.66 U6.29
N$33
  Bottom 0.254: U6.24 32.02,78.36 32.92,77.45 32.92,75.71 33.55,75.07 33.55,71.74 33.87,71.42 R6.2
N$34
  Bottom 0.254: U6.20 33.19,80.36 33.71,79.83 37.68,79.83 38.32,79.2 R8.1
N$35
  Bottom 0.254: U6.21 32.9,79.86 33.55,79.2 37.37,79.2 39.05,77.51 R7.1
N$36  (via drill 0.8)
  Top 0.914: v70.38,71.26 54.19,71.26 52.92,69.99 52.92,68.72
  Bottom 0.914: JP4.2 72.61,73.48 v70.38,71.26
  pour Top (rank 2, no thermals): 53.24,67.45 52.61,67.45 52.61,69.04 53.24,69.04
N$37  (via drill 0.8)
  Top 0.914: v71.02,15.7 68.97,15.7 D1.A
  Bottom 0.914: JP10.2 v71.02,15.7
N$38
  Top 0.356: U12.5 53.88,67.29 53.56,66.98 51.39,66.98 R12.2
N$39
  Top 0.356: U7.5 81.18,16.12 R13.2
N$40
  pour Top (rank 3, no thermals): 57.69,54.12 57.69,51.58 54.51,51.58 54.51,54.75 55.78,54.75 55.78,54.12
N$41
  pour Top (rank 2, no thermals): 53.4,56.02 53.4,57.61 53.08,57.93 52.29,57.93 52.29,58.88 54.83,58.88 54.83,57.93 54.03,57.93 53.72,57.61 53.72,56.02
N$42
  Bottom 0.254: U13.29 112.09,10.19 113.25,9.03 119.6,9.03 121.19,10.62 121.19,16.97 122.45,18.24 JP12.5
N$43
  Bottom 0.254: U13.30 111.59,9.73 112.93,8.4 119.92,8.4 121.82,10.3 121.82,15.06 122.45,15.7 JP12.6
N$44
  Bottom 0.254: U13.31 111.09,9.28 112.61,7.76 120.23,7.76 122.45,9.98 122.45,12.21 123.41,13.16 JP12.7
N$45
  Bottom 0.254: U13.32 110.59,8.83 112.3,7.13 120.55,7.13 123.09,9.67 123.09,10.3 123.41,10.62 JP12.8
N$46
  Bottom 0.254: U13.33 110.09,8.38 111.98,6.49 120.87,6.49 122.45,8.08 JP12.9
N$47
  Bottom 0.254: U13.34 109.59,7.92 111.66,5.86 121.19,5.86 122.45,7.13 123.72,7.13 JP12.10
N$48
  Bottom 0.254: JP11.1 127.85,29.67 127.22,30.3 124.36,30.3 116.42,22.37 114.52,22.37 114.09,21.94 U13.12
N$49
  Bottom 0.254: JP11.2 129.12,25.86 129.44,26.18 129.44,29.35 127.85,30.94 124.04,30.94 116.11,23 114.2,23 113.59,22.39 U13.11
N$50
  Bottom 0.254: JP11.3 129.12,23.32 130.07,24.27 130.07,29.67 128.17,31.57 123.72,31.57 115.79,23.64 113.88,23.64 113.09,22.85 U13.10
N$51  (via drill 0.8)
  Top 0.254: v116.42,26.18 116.42,25.23 116.74,24.91 120.23,24.91 v123.09,22.05
  Bottom 0.254: U13.9 112.59,23.3 115.47,26.18 v116.42,26.18 | JP11.4 126.58,22.05 v123.09,22.05
N$52  (via drill 0.8)
  Top 0.254: v117.69,27.45 115.79,27.45 114.83,26.5 114.83,25.54 116.11,24.27 119.6,24.27 121.82,22.05 121.82,20.78 v123.09,19.51
  Bottom 0.254: JP11.5 126.58,19.51 v123.09,19.51 | U13.8 112.09,23.75 115.79,27.45 v117.69,27.45
N$53  (via drill 0.8)
  Top 0.254: v118.96,28.72 116.11,28.72 114.2,26.81 114.2,25.23 115.79,23.64 119.28,23.64 121.19,21.73 121.19,17.92 122.14,16.97 v123.09,16.97
  Bottom 0.254: JP11.6 126.58,16.97 v123.09,16.97 | U13.7 111.59,24.2 116.11,28.72 v118.96,28.72
N$54  (via drill 0.8)
  Top 0.254: v113.25,27.77 113.25,25.23 115.47,23 118.96,23 120.55,21.41 120.55,15.7 121.82,14.43 v123.09,14.43
  Bottom 0.254: JP11.7 126.58,14.43 v123.09,14.43 | U13.6 111.09,25.61 v113.25,27.77
N$55  (via drill 0.8)
  Top 0.254: v109.75,25.23 110.39,25.23 114.52,21.1 118.01,21.1 118.64,20.46 118.64,5.54 v119.6,4.59
  Bottom 0.254: JP11.8 129.12,10.62 130.07,9.67 130.07,4.59 128.17,2.68 121.5,2.68 v119.6,4.59 | U13.5 110.59,24.39 v109.75,25.23
N$56  (via drill 0.8)
  Top 0.254: v109.44,27.13 110.39,27.13 111.34,26.18 111.34,25.23 114.83,21.73 118.33,21.73 119.28,20.78 119.28,6.81 v121.5,4.59
  Bottom 0.254: JP11.9 129.12,8.08 129.44,7.76 129.44,4.91 127.85,3.32 122.77,3.32 v121.5,4.59 | U13.4 110.09,23.3 108.48,24.91 108.48,26.18 v109.44,27.13
N$57  (via drill 0.8)
  Top 0.254: v111.34,28.08 112.3,27.13 112.3,25.23 115.15,22.37 118.64,22.37 119.92,21.1 119.92,8.71 v123.09,5.54
  Bottom 0.254: JP11.10 127.85,4.59 127.22,3.95 124.04,3.95 123.09,4.91 v123.09,5.54 | U13.3 109.59,22.85 107.85,24.59 107.85,27.45 108.8,28.4 111.03,28.4 v111.34,28.08
N$58
  Bottom 0.254: JP5.1 127.85,70.31 127.22,70.94 124.36,70.94 116.42,63.01 114.52,63.01 114.09,62.58 U14.12
N$59
  Bottom 0.254: JP5.2 129.12,66.5 129.44,66.82 129.44,69.99 127.85,71.58 124.04,71.58 116.11,63.64 114.2,63.64 113.59,63.03 U14.11
N$60
  Bottom 0.254: U14.10 113.09,63.49 113.88,64.28 115.79,64.28 123.72,72.22 128.17,72.22 130.07,70.31 130.07,64.91 129.12,63.96 JP5.3
N$61  (via drill 0.8)
  Top 0.254: v116.42,66.82 116.42,65.87 116.74,65.55 120.23,65.55 v123.09,62.69
  Bottom 0.254: JP5.4 126.58,62.69 v123.09,62.69 | v116.42,66.82 115.47,66.82 112.59,63.94 U14.9
N$62  (via drill 0.8)
  Top 0.254: v117.69,68.09 115.79,68.09 114.83,67.14 114.83,66.18 116.11,64.91 119.6,64.91 121.82,62.69 121.82,61.42 v123.09,60.15
  Bottom 0.254: JP5.5 126.58,60.15 v123.09,60.15 | v117.69,68.09 115.79,68.09 112.09,64.39 U14.8
N$63  (via drill 0.8)
  Top 0.254: v118.96,69.36 116.11,69.36 114.2,67.45 114.2,65.87 115.79,64.28 119.28,64.28 121.19,62.37 121.19,58.56 122.14,57.61 v123.09,57.61
  Bottom 0.254: JP5.6 126.58,57.61 v123.09,57.61 | v118.96,69.36 116.11,69.36 111.59,64.84 U14.7
N$64  (via drill 0.8)
  Top 0.254: v113.25,68.41 113.25,65.87 115.47,63.64 118.96,63.64 120.55,62.05 120.55,56.34 121.82,55.07 v123.09,55.07
  Bottom 0.254: JP5.7 126.58,55.07 v123.09,55.07 | v113.25,68.41 111.09,66.25 U14.6
N$65  (via drill 0.8)
  Top 0.254: v109.75,65.87 110.39,65.87 114.52,61.74 118.01,61.74 118.64,61.1 118.64,46.18 v119.6,45.23
  Bottom 0.254: JP5.8 129.12,51.26 130.07,50.31 130.07,44.91 128.17,43.01 121.82,43.01 v119.6,45.23 | U14.5 110.59,65.03 v109.75,65.87
N$66  (via drill 0.8)
  Top 0.254: v109.44,67.77 110.39,67.77 111.34,66.82 111.34,65.87 114.83,62.37 118.33,62.37 119.28,61.42 119.28,47.45 v121.5,45.23
  Bottom 0.254: JP5.9 129.12,48.72 129.44,48.4 129.44,45.23 127.85,43.64 123.09,43.64 v121.5,45.23 | U14.4 110.09,63.94 108.48,65.55 108.48,66.82 v109.44,67.77
N$67  (via drill 0.8)
  Top 0.254: v111.34,68.72 112.3,67.77 112.3,65.87 115.15,63.01 118.64,63.01 119.92,61.74 119.92,49.35 v123.09,46.18
  Bottom 0.254: JP5.10 127.85,44.91 127.22,44.27 124.36,44.27 123.09,45.55 v123.09,46.18 | U14.3 109.59,63.49 107.85,65.23 107.85,68.09 108.8,69.04 111.03,69.04 v111.34,68.72
N$68
  Bottom 0.254: U14.25 114.09,52.64 114.52,52.21 118.33,52.21 118.64,52.53 118.64,64.28 123.41,69.04 JP6.1
N$69
  Bottom 0.254: U14.26 113.59,52.19 114.2,51.58 118.64,51.58 119.28,52.21 119.28,63.33 122.45,66.5 JP6.2
N$70
  Bottom 0.254: U14.27 113.09,51.73 113.88,50.94 118.96,50.94 119.92,51.9 119.92,61.42 122.45,63.96 JP6.3
N$71
  Bottom 0.254: U14.28 112.59,51.28 113.56,50.31 119.28,50.31 120.55,51.58 120.55,59.52 122.45,61.42 JP6.4
N$72
  Bottom 0.254: U14.29 112.09,50.83 113.25,49.67 119.6,49.67 121.19,51.26 121.19,57.61 122.45,58.88 JP6.5
N$73
  Bottom 0.254: U14.30 111.59,50.38 112.93,49.04 119.92,49.04 121.82,50.94 121.82,55.7 122.45,56.34 JP6.6
N$74
  Bottom 0.254: U14.31 111.09,49.92 112.61,48.4 120.23,48.4 122.45,50.62 122.45,52.85 123.41,53.8 JP6.7
N$75
  Bottom 0.254: U14.32 110.59,49.47 112.3,47.77 120.55,47.77 123.09,50.31 123.09,50.94 123.41,51.26 JP6.8
N$76
  Bottom 0.254: U14.33 110.09,49.02 111.98,47.13 120.87,47.13 122.45,48.72 JP6.9
N$77
  Bottom 0.254: U14.34 109.59,48.56 111.66,46.5 121.19,46.5 122.45,47.77 123.72,47.77 JP6.10
N$78  (via drill 0.8)
  Top 0.254: v104.36,63.33 105.63,63.33 114.2,54.75 114.2,46.5 v115.47,45.23
  Bottom 0.254: U14.2 109.09,63.03 108.8,63.33 v104.36,63.33 | JP13.1 114.2,43.96 v115.47,45.23
N$79  (via drill 0.8)
  Top 0.254: v105.31,61.74 106.26,61.74 109.44,58.56 v109.44,46.18
  Bottom 0.254: 108.59,62.05 U14.1 108.59,61.74 v105.31,61.74 | v109.44,46.18 110.71,44.91 JP13.2
N$80
  Bottom 0.254: JP13.3 108.17,44.91 107.53,45.55 107.53,46.81 107.85,47.13 107.85,54.12 108.8,55.07 108.8,59.83 108.28,60.36 U14.48
N$81  (via drill 0.8)
  Top 0.254: v104.04,60.47 105.63,58.88 v105.63,46.18
  Bottom 0.254: U14.47 104.65,59.86 v104.04,60.47 | v105.63,46.18 JP13.4
N$82  (via drill 0.8)
  Top 0.254: v103.25,58.72 103.09,58.56 v103.09,46.18
  Bottom 0.254: JP13.5 v103.09,46.18 | U14.46 103.89,59.36 v103.25,58.72
N$83  (via drill 0.8)
  Top 0.254: v100.55,46.18 101.66,47.29 v101.66,57.77
  Bottom 0.254: v100.55,46.18 JP13.6 | U14.45 104.97,58.86 103.41,57.29 102.14,57.29 v101.66,57.77
N$84
  Bottom 0.254: U14.35 109.09,48.11 111.98,45.23 111.98,42.69 JP14.1
N$85
  Bottom 0.254: U14.36 108.59,47.02 108.17,46.6 108.17,45.86 109.44,44.59 109.44,42.69 JP14.2
N$86
  Bottom 0.254: JP14.3 106.9,42.69 106.9,47.13 107.09,47.33 U14.37
N$87
  Bottom 0.254: U14.38 106.08,55.36 104.36,53.64 104.36,42.69 JP14.4
N$88
  Bottom 0.254: U14.39 105.62,55.86 103.72,53.96 103.72,48.72 101.82,46.81 101.82,42.69 JP14.5
N$89
  Bottom 0.254: U14.40 105.17,56.36 103.09,54.28 103.09,50.94 99.28,47.13 99.28,42.69 JP14.6
N$90
  Bottom 0.254: U13.2 109.09,22.39 107.22,24.27 107.22,27.77 108.8,29.35 112.3,29.35 113.25,30.3 JP15.1
N$91
  Bottom 0.254: JP15.2 110.71,30.3 110.39,29.99 108.48,29.99 106.58,28.08 106.58,23.95 108.59,21.94 U13.1
N$92
  Bottom 0.254: JP15.3 108.17,30.62 105.94,28.4 105.94,20.14 106.37,19.72 U13.48
N$93
  Bottom 0.254: JP15.4 105.63,29.04 105.31,28.72 105.31,19.83 105.92,19.22 U13.47
N$94
  Bottom 0.254: U13.46 105.47,18.72 104.67,19.51 104.67,22.68 102.77,24.59 102.77,25.54 103.09,25.86 JP15.5
N$95
  Bottom 0.254: U13.45 105.01,18.22 104.04,19.19 104.04,22.37 100.55,25.86 JP15.6
N$96
  Bottom 0.254: U13.35 109.09,11.23 108.48,10.62 101.5,10.62 99.59,12.53 99.59,15.38 98.96,16.02 98.96,22.68 96.74,24.91 96.74,36.66 97.69,37.61 99.59,37.61 100.87,36.34 110.71,36.34 JP16.1
N$97
  Bottom 0.254: U13.36 108.59,11.68 108.17,11.26 101.82,11.26 100.23,12.84 100.23,15.7 99.59,16.34 99.59,23 97.37,25.23 97.37,36.34 98.01,36.97 99.28,36.97 100.55,35.7 108.8,35.7 JP16.2
N$98
  Bottom 0.254: JP16.3 106.9,35.07 99.59,35.07 98.64,34.11 98.64,25.86 100.87,23.64 100.87,16.97 101.5,16.34 101.5,13.48 102.45,12.53 104.36,12.53 106.05,14.22 U13.37
N$99  (via drill 0.8)
  Top 0.254: v104.04,24.91 104.04,19.51 v102.14,17.61
  Bottom 0.254: JP16.4 104.36,32.53 104.36,29.35 104.04,29.04 v104.04,24.91 | U13.38 105.6,14.72 104.04,13.16 102.77,13.16 102.14,13.79 v102.14,17.61
N$100  (via drill 0.8)
  Top 0.254: v103.41,14.43 100.87,16.97 100.87,18.24 101.82,19.19 v101.82,26.5
  Bottom 0.254: JP16.5 101.82,32.53 v101.82,26.5 | U13.39 104.19,15.22 v103.41,14.43
N$101
  Bottom 0.254: JP16.6 99.28,32.53 99.28,26.18 103.41,22.05 103.41,16.34 104.02,15.72 U13.40
N$102
  Top 0.254: U2.9 91.79,58.7 90.92,57.83 RA2.2
N$103
  Top 0.254: U2.2 91.79,55.68 90.76,54.65 RA1.2
N$104
  Top 0.356: U5.25 87.48,30.25 85.94,28.72 RFB7.1
N$105
  Top 0.356: U5.26 87.78,29.6 85.62,27.45 RFB8.1
N$106  (via drill 0.8)
  Top 0.356: TP14.TP 42.45,80.15 v32.92,70.63
  Bottom 0.254: U6.25 31.67,76.95 32.28,76.34 32.28,75.39 32.92,74.75 v32.92,70.63
N$107
  Top 0.356: U15.5 84.35,50.34 C25.1
N$108
  Top 0.356: U15.4 82.55,50.84 R20.1
PA0  (via drill 0.8)
  Top 0.356: v16.09,53.8 16.09,66.82 18.32,69.04 33.24,69.04 42.76,78.56 78.32,78.56 78.93,77.96 S1.1
  Top 0.914: S1.2 S1.1
  Bottom 0.356: JP1.12 v16.09,53.8
PA2  (via drill 0.8)
  Top 0.356: v11.33,72.85 9.43,70.94 9.43,69.67 | v9.43,49.99 9.43,69.67 | R5.1 9.43,69.67
  Bottom 0.254: U6.30 27.45,74.69 26.57,73.8 18.95,73.8 18,72.85 v11.33,72.85
  Bottom 0.356: v9.43,49.99 12.6,49.99 JP1.14
PA7
  Bottom 0.254: U6.40 22.11,79.86 20.54,81.42 RS2.1 19.8,82.16 19.27,82.69 9.11,82.69 8.16,81.74 8.16,46.81 8.79,46.18 JP1.17
PA9
  Bottom 0.914: JP10.1 JP2.44
PB4  (via drill 0.8)
  Top 0.356: U5.16 90.62,36.1 91.66,35.07 91.66,25.23 90.7,24.27 77.37,24.27 73.88,27.77 69.43,27.77 68.16,29.04 68.16,34.43 v66.89,35.7
  Bottom 0.356: JP2.25 63.4,37.29 65.31,37.29 v66.89,35.7
PB5  (via drill 0.8)
  Top 0.356: U5.15 90.92,36.75 92.29,35.38 92.29,24.91 91.02,23.64 77.05,23.64 73.56,27.13 69.11,27.13 67.53,28.72 67.53,33.16 v66.89,33.8
  Bottom 0.356: JP2.26 v66.89,33.8
PB6  (via drill 0.8)
  Top 0.254: v79.28,57.61 76.42,54.75 76.42,52.21 76.68,51.95 U1.16 76.68,48.67 76.42,48.4 69.11,48.4 v66.89,46.18
  Top 0.356: U4.6 52.61,36.97 53.24,36.34 56.41,36.34 v57.37,37.29
  Bottom 0.356: JP7.3 122.77,74.12 122.14,73.48 94.2,73.48 79.28,58.56 v79.28,57.61 | v66.89,46.18 65.62,44.91 61.5,44.91 60.86,44.27 60.86,39.83 JP2.23 58.64,38.56 v57.37,37.29
PB7  (via drill 0.8)
  Top 0.356: U5.17 90.32,35.45 91.02,34.75 91.02,25.54 90.39,24.91 77.69,24.91 74.19,28.4 69.75,28.4 68.8,29.35 68.8,35.7 v66.89,37.61
  Bottom 0.356: JP2.24 65.94,38.56 v66.89,37.61
PB8  (via drill 0.8)
  Top 0.254: v66.89,39.51 71.34,43.96 80.55,43.96 81.23,43.27 U1.8
  Bottom 0.356: JP2.19 63.4,42.37 63.4,40.47 64.03,39.83 65.62,39.83 65.94,39.51 v66.89,39.51
PB9  (via drill 0.8)
  Top 0.254: v66.89,44.27 70.38,47.77 77.05,47.77 77.33,48.05 U1.15 77.33,52.25 77.05,52.53 77.05,54.44 78.32,55.7 v79.28,55.7
  Top 0.356: v66.89,44.27 66.89,43.32 65.94,42.37 v59.59,42.37 | v57.05,39.83 55.52,38.3 U4.5
  Bottom 0.356: JP7.2 125.31,74.12 124.04,72.85 94.52,72.85 80.55,58.88 80.55,56.98 v79.28,55.7 | JP2.20 66.26,43.64 v66.89,44.27 | v59.59,42.37 v57.05,39.83
PB11
  Bottom 0.254: U6.2 24.95,86.53 23.71,87.77 7.52,87.77 6.25,86.5 6.25,24.59 7.52,23.32 JP1.35
PB12
  Bottom 0.254: U6.3 25.45,86.98 24.03,88.41 7.2,88.41 5.62,86.82 5.62,24.27 7.84,22.05 12.28,22.05 12.6,22.37 12.6,23 12.92,23.32 JP1.36
PB13
  Bottom 0.254: U6.4 25.95,87.44 24.35,89.04 6.89,89.04 4.98,87.14 4.98,23.95 8.16,20.78 JP1.37
PC1
  Bottom 0.254: U6.31 26.95,75.14 26.25,74.44 18.63,74.44 17.68,73.48 12.6,73.48 11.96,74.12 10.7,74.12 9.43,72.85 9.43,59.52 10.06,58.88 JP1.7
PC2  (via drill 0.8)
  Top 0.356: 79.69,28.72 RFB6.2 79.69,31.26 | 79.69,31.26 RFB4.2 79.69,33.8 | 79.69,33.8 RFB2.2 | RFB7.2 79.69,28.72 | RFB5.2 79.69,31.26 | RFB3.2 79.69,33.8 | 81.81,36.34 RFB1.2 83.5,38.34 v85.94,40.78 | 79.69,28.72 RFB8.2 | R18.2 81.81,36.34 | 81.81,36.34 80.55,36.34 80.39,36.18 | 80.39,36.18 79.69,35.49 RFB2.2 | TP4.TP 80.39,36.18 | U3.7 93.25,43.32 93.88,43.96 95.47,43.96 v96.1,43.32 | v17.36,56.34 18.63,57.61 18.63,66.82 19.59,67.77 33.87,67.77 43.4,77.3 77.69,77.3 79.91,75.07 v82.45,75.07 | RFB2.2 71.97,35.07 v68.48,38.56
  Bottom 0.356: v85.94,40.78 88.48,43.32 v96.1,43.32 | v82.45,75.07 82.13,75.07 79.59,72.53 79.59,70.31 69.43,60.15 69.43,39.51 v68.48,38.56 | JP1.10 v17.36,56.34
PC4
  Bottom 0.254: U6.43 21.56,81.36 19.59,83.33 8.79,83.33 7.52,82.06 7.52,46.5 9.11,44.91 12.6,44.91 JP1.20
PC5
  Bottom 0.254: U6.44 22.01,81.86 19.9,83.96 8.47,83.96 6.89,82.38 6.89,46.18 9.43,43.64 JP1.19
PC9
  Bottom 0.356: JP2.46 63.4,9.35 60.86,9.35 59.91,8.4 59.91,5.86 58.95,4.91 20.22,4.91 18.95,6.17 18.95,17.61 16.73,19.83 SJ2.2
PC10  (via drill 0.8)
  Top 0.356: v115.47,12.84 110.39,12.84 108.8,11.26 100.23,11.26 98.33,13.16 98.33,21.1 97.69,21.73 76.1,21.73 73.24,24.59 v70.07,24.59 | v115.47,53.48 115.47,54.44 104.04,65.87 84.04,65.87 v81.5,68.41 | U8.6 U9.6 46.26,19.19 48.48,16.97 51.65,16.97 53.88,19.19 U11.6 v57.37,19.19
  Bottom 0.254: U13.19 114.58,16.72 114.2,16.34 114.2,14.11 v115.47,12.84 | U14.19 114.58,57.36 114.2,56.98 114.2,54.75 v115.47,53.48
  Bottom 0.356: v81.5,68.41 80.55,68.41 71.34,59.2 71.34,25.86 v70.07,24.59 68.8,23.32 66.58,23.32 65.31,22.05 64.03,22.05 63.4,21.41 63.4,21.1 63.08,20.78 JP2.37 58.95,20.78 v57.37,19.19
PC11  (via drill 0.8)
  Top 0.356: U11.2 v47.84,20.46 | U8.2 U9.2 v35.46,20.46
  Bottom 0.356: JP2.38 63.4,19.51 60.86,19.51 59.27,17.92 48.48,17.92 47.84,18.56 v47.84,20.46 v35.46,20.46
PC12  (via drill 0.8)
  Top 0.356: v117.53,16.34 111.34,16.34 110.07,15.06 110.07,13.48 108.48,11.89 100.55,11.89 98.96,13.48 98.96,21.41 98.01,22.37 76.42,22.37 72.92,25.86 69.43,25.86 v68.16,24.59 | v117.53,56.98 113.88,56.98 104.36,66.5 84.35,66.5 82.77,68.09 82.77,69.67 v82.13,70.31 | U8.5 U9.5 46.26,17.92 47.84,16.34 51.97,16.34 53.56,17.92 U11.5 58.32,17.92 58.95,18.56 58.95,22.68 v58.32,23.32
  Bottom 0.254: U13.18 116.65,17.22 v117.53,16.34 | U14.18 116.65,57.86 v117.53,56.98
  Bottom 0.356: v82.13,70.31 81.5,70.31 70.7,59.52 70.7,27.13 v68.16,24.59 63.4,24.59 JP2.35 v58.32,23.32
PC15  (via drill 0.8)
  Top 0.356: U12.3 55.26,65.23 65.94,65.23 66.89,64.28 v66.89,56.34
  Bottom 0.356: v66.89,56.34 JP2.10
PD0  (via drill 0.8)
  Top 0.356: U8.1 U9.1 37.68,21.75 v37.68,23.32
  Bottom 0.356: JP2.36 63.72,23.32 63.4,23 63.4,22.68 62.77,22.05 38.95,22.05 v37.68,23.32
PD1  (via drill 0.8)
  Top 0.356: v50.06,25.86 50.06,21.79 U11.1
  Bottom 0.356: JP2.33 v50.06,25.86
PD2  (via drill 0.8)
  Top 0.356: v117.53,18.08 110.87,18.08 109.44,16.65 109.44,13.79 108.17,12.53 100.87,12.53 99.59,13.79 99.59,21.73 98.33,23 76.73,23 73.24,26.5 67.53,26.5 v66.89,25.86 | v117.53,58.72 113.09,58.72 104.67,67.14 84.67,67.14 83.4,68.41 83.4,70.79 82.45,71.74 v80.86,71.74
  Bottom 0.254: U13.17 117.17,17.72 v117.53,18.08 | U14.17 117.17,58.36 v117.53,58.72
  Bottom 0.356: v80.86,71.74 80.86,70.63 70.07,59.83 70.07,29.04 v66.89,25.86 JP2.34
PD8  (via drill 0.8)
  Top 0.356: U7.3 77.57,19.07 76.42,17.92 76.42,4.27 74.99,2.84 19.43,2.84 17.68,4.59 v17.68,16.97
  Bottom 0.356: v17.68,16.97 16.09,18.56 16.09,20.78 14.82,22.05 13.23,22.05 12.6,21.41 12.6,19.51 JP1.40
PD9  (via drill 0.8)
  Top 0.356: U7.4 78.76,16.77 v78.64,16.65
  Bottom 0.356: JP1.41 12.6,14.43 14.82,14.43 15.77,13.48 15.77,6.49 19.27,3 84.04,3 85.94,4.91 85.94,14.43 87.21,15.7 87.21,16.97 86.58,17.61 79.59,17.61 v78.64,16.65
PE2  (via drill 0.8)
  Top 0.356: v86.9,91.27 84.17,93.99 J3.3
  Bottom 0.356: JP2.15 60.86,49.99 60.86,59.52 61.5,60.15 66.89,60.15 75.15,68.41 75.15,69.67 86.9,81.42 v86.9,91.27
PE4  (via drill 0.8)
  Top 0.356: v66.89,49.35 69.11,49.35 78.64,58.88 84.67,58.88 85.31,58.24 85.31,57.13 84.67,56.5 84.67,55.39 85.31,54.76 U15.1
  Bottom 0.356: JP2.13 63.4,49.99 65.31,49.99 65.94,49.35 v66.89,49.35
PE5  (via drill 0.8)
  Top 0.254: v90.07,56.34 90.18,56.45 U2.1
  Top 0.356: v90.07,59.52 78.32,59.52 70.07,51.26 v66.89,51.26
  Bottom 0.356: v90.07,56.34 v90.07,59.52 | JP2.14 v66.89,51.26
PE6  (via drill 0.8)
  Top 0.254: 91.18,60.78 U2.10
  Top 0.356: 91.18,60.78 89.44,60.78 88.8,60.15 78,60.15 71.02,53.16 v66.89,53.16
  Bottom 0.356: JP2.11 63.4,52.53 66.26,52.53 v66.89,53.16
RD_N  (via drill 0.8)
  Top 0.254: v38,91.27 42.49,91.27 48.9,84.85 76.52,84.85 79.06,82.31 104.57,82.31 111.56,89.3 112.61,89.3 113.25,89.93 v113.25,90
  Bottom 0.254: U6.13 32.18,83.86 32.28,83.96 32.28,88.72 33.87,90.31 R4.1 34.61,91.05 34.83,91.27 v38,91.27 | J2.6 v113.25,90
RD_P  (via drill 0.8)
  Top 0.254: v113.25,88.09 113.25,88.15 112.61,88.79 111.77,88.79 104.78,81.8 78.85,81.8 76.31,84.34 48.69,84.34 44.88,88.15 43.46,88.15 v42.45,87.14
  Bottom 0.254: U6.14 32.63,83.36 32.92,83.64 32.92,87.61 33.55,88.25 R3.1 34.61,87.67 35.14,87.14 v42.45,87.14 | J2.4 113.88,87.45 v113.25,88.09
RFB
  Top 0.254: U1.4 78.63,39.72 R19.1
TD_N  (via drill 0.8)
  Top 0.254: v113.25,85.87 113.25,85.8 112.61,85.17 109.97,85.17 105.84,81.04 78.43,81.04 75.89,83.58 42.51,83.58 41.17,84.92 v41.17,85.87
  Bottom 0.254: U6.16 32.58,82.36 33.55,83.33 33.55,85.23 33.87,85.55 R2.1 34.61,86.13 34.98,86.5 40.54,86.5 v41.17,85.87 | J2.3 113.56,86.19 v113.25,85.87
TD_P  (via drill 0.8)
  Top 0.254: v39.43,81.9 40.63,81.9 41.81,83.07 75.68,83.07 78.22,80.53 106.05,80.53 110.18,84.66 112.61,84.66 113.25,84.03 v113.25,83.96
  Bottom 0.254: U6.17 32.98,81.86 R1.1 34.61,82.91 35.14,82.38 38.95,82.38 v39.43,81.9 | J2.1 113.56,83.64 v113.25,83.96
USB_N  (via drill 0.8)
  Top 0.356: J1.2 84.62,15.75 v84.04,16.34
  Bottom 0.254: v84.04,16.34 84.1,16.34 84.74,15.7 84.74,5.33 83.62,4.21 19.69,4.21 16.98,6.92 16.98,15.8 15.46,17.33 15.46,19.19 JP1.38
USB_P  (via drill 0.8)
  Top 0.356: J1.3 86.62,15.65 v85.94,16.34
  Bottom 0.254: v85.94,16.34 85.88,16.34 85.24,15.7 85.24,5.12 83.83,3.7 19.48,3.7 16.47,6.71 16.47,15.6 15.1,16.97 12.6,16.97 JP1.39
VCC  (via drill 0.8)
  Top 0.254: U2.6 93.77,60.68 v94.52,61.42 | U1.11 U1.10 U1.9 | U2.5 93.29,56.18 v94.52,56.18
  Top 0.356: U5.1 96.96,28.3 97.85,29.19 | U8.7 U9.7 | U8.8 U9.8 | U5.18 88.43,34.8 88.16,35.07 88.16,37.71 C5.1 | U8.3 U9.3 36.1,19.2 35.78,18.88 | U15.2 84.35,54.44 82.61,56.18
  Top 0.914: 37.05,85.23 v38.32,85.23 38.32,89.04 v38.95,89.68 | v117.38,19.83 112.3,19.83 103.72,28.4 98.64,28.4 97.85,29.19 97.06,29.99 97.06,37.92 94.83,40.15 94.52,40.15 | C5.1 89.49,40.15 | 89.49,40.15 C6.1 89.49,42.42 R16.2 86.47,43.11 83.09,46.5 81.81,46.5 80.58,47.73 U1.10 80.58,51.58 | 94.52,40.15 89.49,40.15 | U3.8 94.52,40.15 | C4.1 80.58,51.58 | 80.58,51.58 80.58,54.16 82.61,56.18 v84.04,57.61
  Bottom 0.254: U6.22 32.61,79.36 34.35,77.61 C8.1 35.56,78.56 37.21,78.56 38.16,77.61 38.16,76.34 38.48,76.03 40.76,76.03 | U6.48 23.05,85.15 C9.1 | U6.32 26.45,75.59 25.94,75.07 17.68,75.07 v17.2,74.6
  Bottom 0.356: J2.AG 131.98,90.53 131.98,87.14 | 131.98,87.14 131.98,80.79 | 131.98,80.79 v131.98,77.93 | J2.AY 131.31,81.46 131.98,80.79 | 121.19,84.92 121.19,82.38 120.23,81.42 C11.1 | J2.2 121.19,84.92 | J2.5 121.19,88.72 | 121.19,88.72 C12.1 | 121.19,84.92 121.19,87.14 | 121.19,87.14 131.98,87.14 | 121.19,87.14 121.19,88.72
  Bottom 0.914: v94.52,56.18 v94.52,61.42 94.52,63.33 93.88,63.96 90.39,63.96 v84.04,57.61 | C13.2 R3.2 36.31,89.58 36.41,89.68 | C14.1 R1.2 R2.2 36.31,85.23 v38.32,85.23 | R8.2 R7.2 40.76,76.03 40.76,75.17 v42.13,73.8 | R4.2 36.31,89.68 36.41,89.68 | 36.41,89.68 v38.95,89.68 | v71.66,76.03 JP4.1 | RS3.1 30.06,71.68 | 30.06,71.68 v30.06,70.31 | RS4.1 30.06,71.68 | RS1.1 15.14,79.94 v15.14,78.56 | v21.17,70.63 21.59,71.05 C10.1 R11.2 | v23.24,86.66 22.98,86.4 C9.1 | v102.77,76.03 v102.77,83.64
  other vias: 117.38,60.47
  pour Bottom (no thermals): 114.83,60.78 118.01,60.78 118.01,59.83 114.83,59.83
  pour Bottom (no thermals): 114.83,20.14 118.01,20.14 118.01,19.19 114.83,19.19
  pour Top (rank 6): -0.1,-0.17 137.06,-0.17 137.06,100.79 -0.1,100.79
VCC/2
  Top 0.356: 91.34,45.23 91.98,45.87 U3.3 91.98,49.98 TP9.TP | 91.34,45.23 90.7,44.59 U3.5 | 88.8,45.55 C26.2 R17.2 85.31,46.28 R20.2 | R16.1 88.8,45.55 | 88.8,45.55 91.02,45.55 91.34,45.23
VDD  (via drill 0.8)
  Top 0.914: v91.97,74.44 91,73.46 S1.3 S1.4 79.25,73.46 78.32,72.53 v78.32,70.94
  Bottom 0.914: JP2.22 66.26,41.1 68.48,43.32 68.48,60.47 76.42,68.41 JP3.2 v78.32,70.94 | v91.97,74.44 119.28,74.44 JP7.4
VIN
  Top 0.254: U1.5 79.28,40.35 R19.2
  Top 0.356: R19.2 81.71,39.51 R18.1
VOUT  (via drill 0.8)
  Top 0.254: 83.09,42.69 83.09,42.05 81.81,40.78 80.23,40.78 79.93,41.08 U1.6 | 83.09,42.69 v83.09,44.27 | TP3.TP 83.09,42.69
  Top 0.356: C25.2 v89.12,49.99
  Bottom 0.356: v83.09,44.27 86.58,44.27 89.12,46.81 v89.12,49.99

## Text on the board
Top: TOP | mini Impedance Spectrometer / Peter Feichtinger 2014 | REV 1.0
Bottom: BOTTOM
tDocu: 5V | PHY JTAG | Icc | I2C | User | Reset | Idd | Force | HI | Sense | Sense | Force | GND | Sense | LO | Force | VBUS | mini Impedance Spectrometer / Peter Feichtinger 2014 | REV 1.0